# EAGLE board piano_keys (EAGLE 8.6.0)
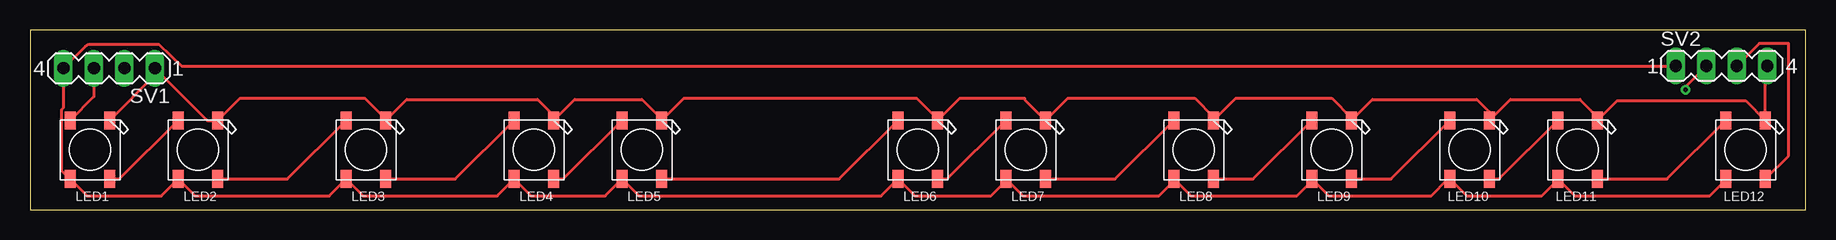
[diagram p0: board, top side]
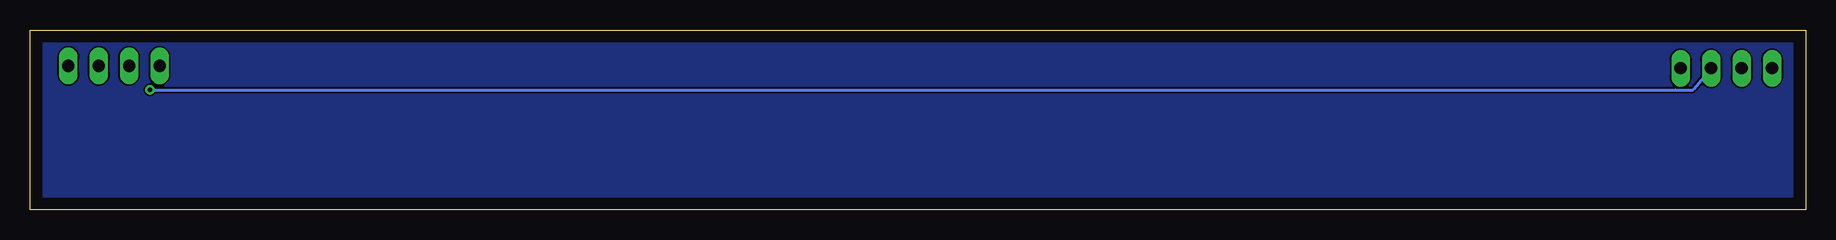
[diagram p1: board, bottom side, seen from below]

Size 148 x 15 mm. Coordinates in mm from the lower left corner, seen from the top.
Outline: 0,0 148,0 148,15 0,15 0,0
Copper layers (1*16): Top 0.035mm / dielectric 1.5mm / Bottom 0.035mm
Design rules "default": minimum track width 6mil, minimum drill 0.35mm, track to track 6mil, track to pad 6mil, pad to pad 6mil, via to via 6mil, smd to smd 6mil, copper to edge 40mil, drill to drill 6mil, minimum pad ring 10mil, minimum via ring 8mil, stop-mask expansion 4mil, vias tented up to drill 0mil, thermal gap 10mil

## Footprints (pad centres in the part's own frame; a part is rotated, then mirrored left to right if it is on the bottom)
WS2812B = smd 1.5 x 0.9: 1-VDD 2.45,-1.65; 2-DOUT 2.45,1.65; 3-GND -2.45,1.65; 4-DIN -2.45,-1.65
MA04-1 = drill 1.016 long: 1 -3.81,0; 2 -1.27,0; 3 1.27,0; 4 3.81,0

## Placement (x,y rotation side)
LED1  WS2812B5050  [WS2812B]  5,5 270 top
LED2  WS2812B5050  [WS2812B]  14,5 270 top
LED3  WS2812B5050  [WS2812B]  28,5 270 top
LED4  WS2812B5050  [WS2812B]  42,5 270 top
LED5  WS2812B5050  [WS2812B]  51,5 270 top
LED6  WS2812B5050  [WS2812B]  74,5 270 top
LED7  WS2812B5050  [WS2812B]  83,5 270 top
LED8  WS2812B5050  [WS2812B]  97,5 270 top
LED9  WS2812B5050  [WS2812B]  108.5,5 270 top
LED10  WS2812B5050  [WS2812B]  120,5 270 top
LED11  WS2812B5050  [WS2812B]  129,5 270 top
LED12  WS2812B5050  [WS2812B]  143,5 270 top
SV1  [MA04-1]  6.6,11.8 180 top
SV2  [MA04-1]  141,12 0 top

## Library data of the parts
LED1-LED12 = adafruit
SV1 SV2 = con-lstb; OC_FARNELL: unknown; OC_NEWARK: unknown

## Nets
5V1: LED1.1-VDD LED2.1-VDD LED3.1-VDD LED4.1-VDD LED5.1-VDD LED6.1-VDD LED7.1-VDD LED8.1-VDD LED9.1-VDD LED10.1-VDD LED11.1-VDD LED12.1-VDD SV1.4 SV2.1
DIN: LED1.4-DIN SV1.3
DIN_1: SV1.2 SV2.2
DOUT_1: LED12.2-DOUT SV2.3
GND: LED1.3-GND LED2.3-GND LED3.3-GND LED4.3-GND LED5.3-GND LED6.3-GND LED7.3-GND LED8.3-GND LED9.3-GND LED10.3-GND LED11.3-GND LED12.3-GND SV1.1 SV2.4
N$2: LED3.2-DOUT LED4.4-DIN
N$3: LED4.2-DOUT LED5.4-DIN
N$4: LED5.2-DOUT LED6.4-DIN
N$5: LED6.2-DOUT LED7.4-DIN
N$6: LED7.2-DOUT LED8.4-DIN
N$7: LED8.2-DOUT LED9.4-DIN
N$8: LED9.2-DOUT LED10.4-DIN
N$9: LED10.2-DOUT LED11.4-DIN
N$10: LED11.2-DOUT LED12.4-DIN
N$11: LED1.2-DOUT LED2.4-DIN
N$12: LED2.2-DOUT LED3.4-DIN

## Tracks (layer width: path | path; a pad name or v marks a point on that pad's centre or on a via)
5V1
  Top 0.254: LED12.1-VDD 141.35,2.49 140,1.14 128.76,1.14 LED11.1-VDD 127.35,2.49 126,1.14 119.76,1.14 LED10.1-VDD 118.21,2.55 116.8,1.14 108.26,1.14 LED9.1-VDD 106.85,2.39 105.6,1.14 96.76,1.14 LED8.1-VDD 95.35,2.39 94.1,1.14 82.76,1.14 LED7.1-VDD 81.35,2.39 80.1,1.14 73.76,1.14 LED6.1-VDD 70.94,1.14 50.76,1.14 LED5.1-VDD 47.94,1.14 41.76,1.14 LED4.1-VDD 38.94,1.14 27.76,1.14 LED3.1-VDD 24.94,1.14 13.76,1.14 LED2.1-VDD 10.94,1.14 4.76,1.14 LED1.1-VDD 2.62,3.28 2.62,8.32 2.79,8.48 SV1.4 4.59,13.6 4.9,13.8 10.74,13.8 12.64,12 SV2.1
DIN
  Top 0.254: SV1.3 5.33,9.43 LED1.4-DIN
DIN_1  (via drill 0.35)
  Top 0.254: SV2.2 138,10.27 v138,10
  Bottom 0.254: SV1.2 9.28,10.1 9.38,10 10.84,10 10.85,10 v138,10
DOUT_1
  Top 0.254: LED12.2-DOUT 146.6,4.5 146.6,13.86 144.13,13.86 SV2.3
GND
  Top 0.254: LED1.3-GND 10.41,11.21 SV1.1 14.76,7.45 LED2.3-GND 17.5,9.3 27.9,9.3 29.65,7.55 LED3.3-GND 31.4,9.2 42.3,9.2 43.65,7.85 LED4.3-GND 45.4,9.2 51,9.2 52.65,7.55 LED5.3-GND 54.5,9.3 73.9,9.3 75.65,7.55 LED6.3-GND 77.5,9.3 82.9,9.3 82.9,9.2 LED7.3-GND 86.5,9.3 97.1,9.3 98.65,7.75 LED8.3-GND 100.5,9.3 108.5,9.3 110.15,7.65 LED9.3-GND 111.9,9.2 120.6,9.2 121.65,8.15 LED10.3-GND 123.4,9.2 129.2,9.2 130.65,7.75 LED11.3-GND 132.3,9.1 143,9.1 LED12.3-GND 144.65,11.84 SV2.4
N$1
  pour Bottom: 0.4,14.5 147.5,14.5 147.5,0.3 0.5,0.3 0.5,14.2
N$2
  Top 0.254: LED3.2-DOUT 35.45,2.55 LED4.4-DIN
N$3
  Top 0.254: LED4.2-DOUT 44.45,2.55 LED5.4-DIN
N$4
  Top 0.254: LED5.2-DOUT 67.45,2.55 LED6.4-DIN
N$5
  Top 0.254: LED6.2-DOUT 76.45,2.55 LED7.4-DIN
N$6
  Top 0.254: LED7.2-DOUT 90.45,2.55 LED8.4-DIN
N$7
  Top 0.254: LED8.2-DOUT 101.95,2.55 LED9.4-DIN
N$8
  Top 0.254: LED9.2-DOUT 113.45,2.55 LED10.4-DIN
N$9
  Top 0.254: LED10.2-DOUT 122.45,2.55 LED11.4-DIN
N$10
  Top 0.254: LED11.2-DOUT 136.45,2.55 LED12.4-DIN
N$11
  Top 0.254: LED1.2-DOUT 7.45,2.55 LED2.4-DIN
N$12
  Top 0.254: LED2.2-DOUT 21.45,2.55 LED3.4-DIN